# Altium PCB Vapour Phase Shield.PcbDoc
Units mm, origin at the board's own origin, x right, y up, seen from the top; angles counter-clockwise.
Board outline 80 x 100 mm, 2 copper layers (Top Layer, Bottom Layer), stack 1.621 mm thick; 38 components, 25 nets, 171 pads, 312 vias.
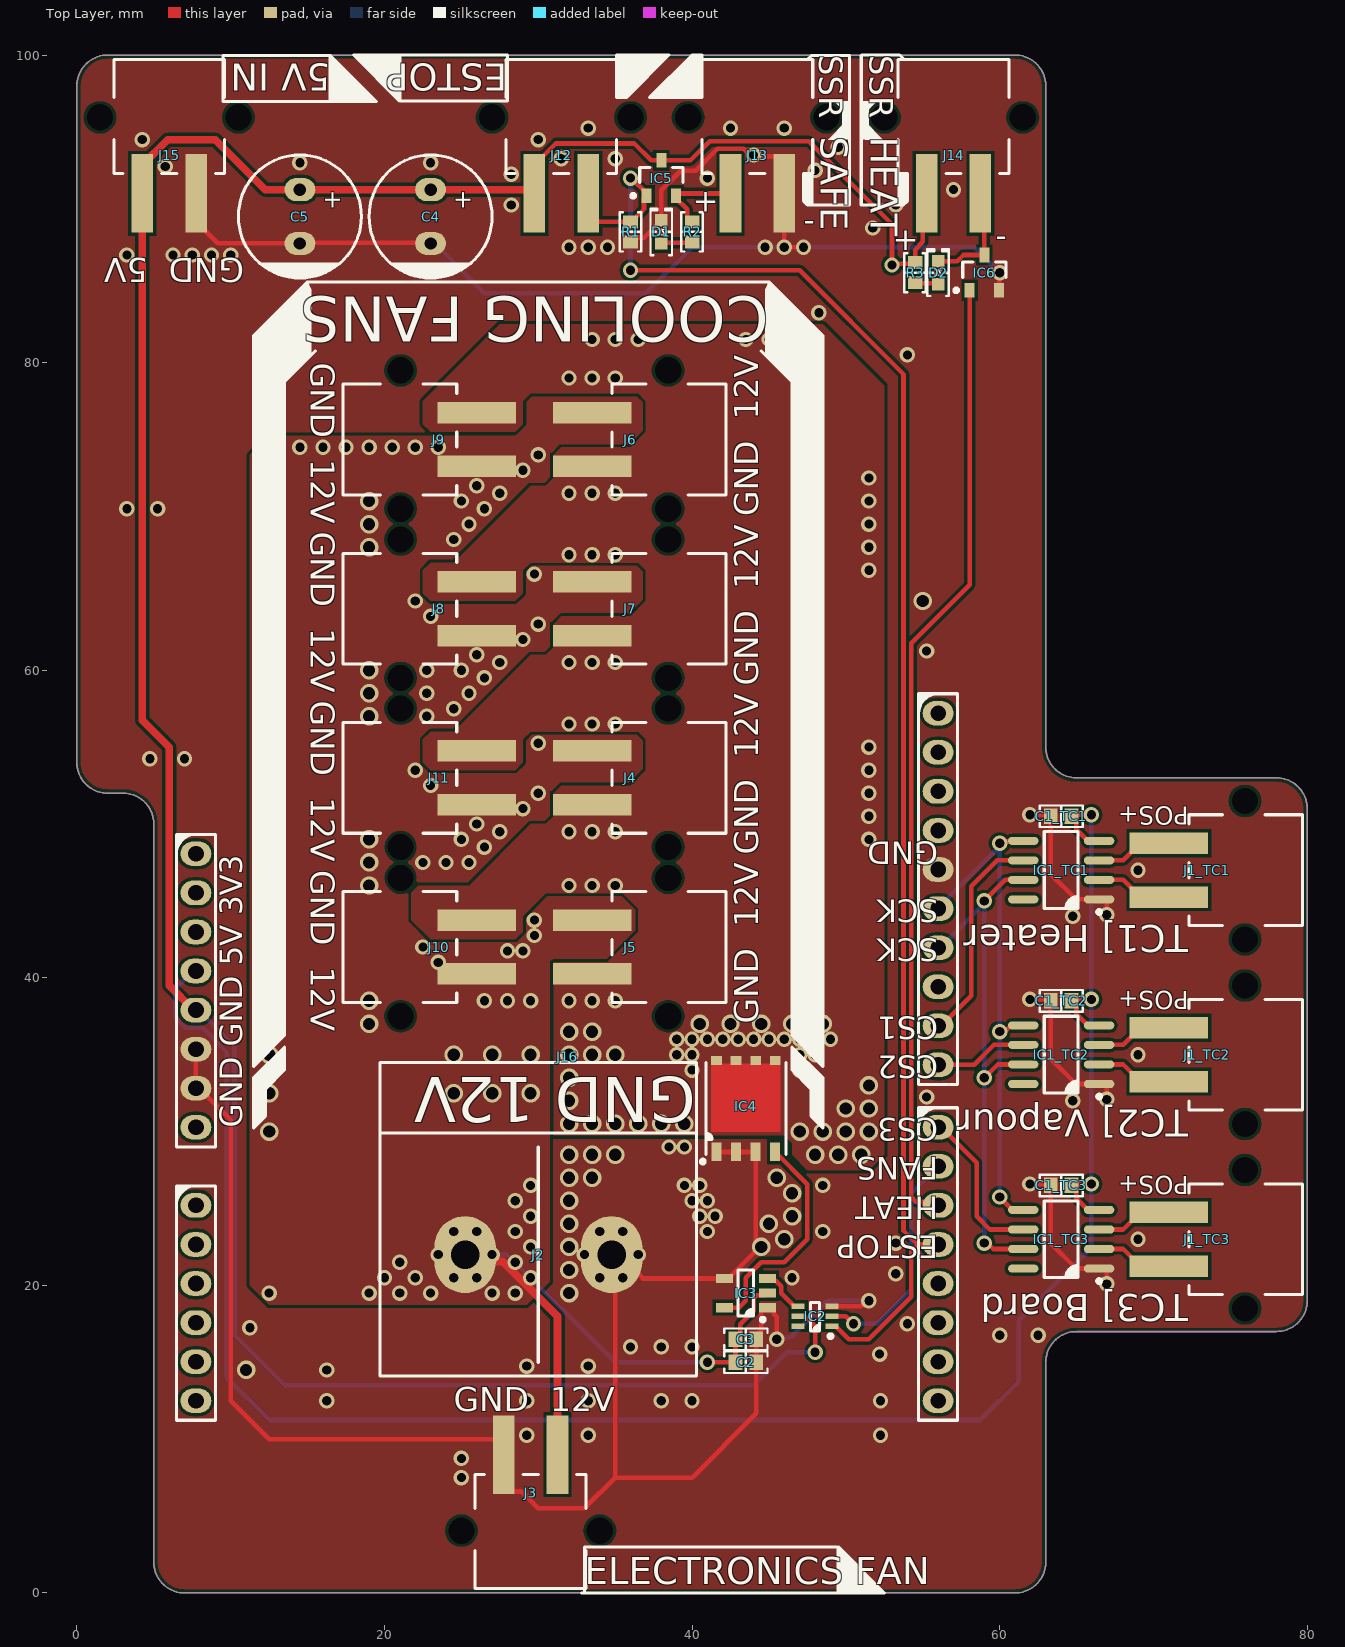
[diagram p0: Top Layer view]
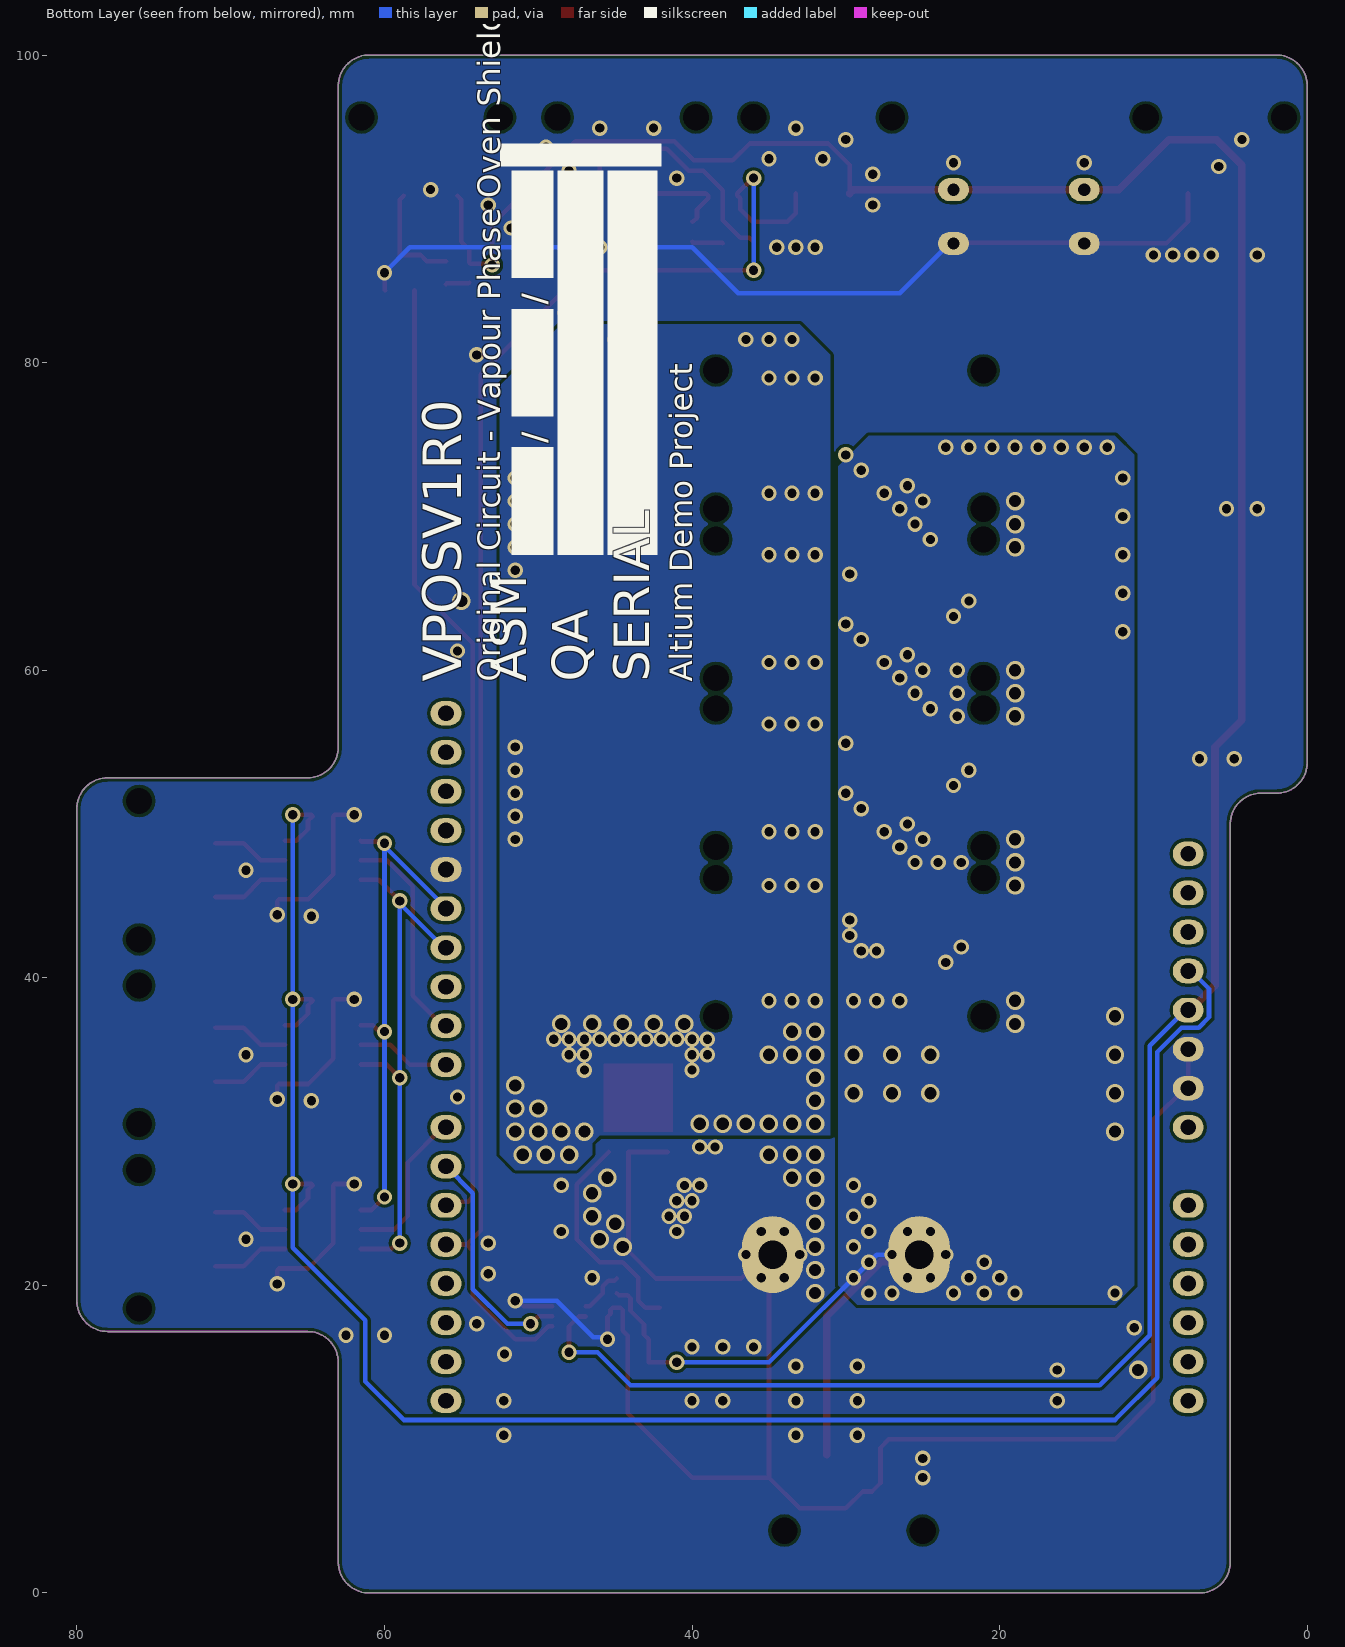
[diagram p1: Bottom Layer view, seen from below]

## Layer stack, top to bottom
Top Solder: solder mask 0.0102, Solder Resist, Dk 3.5
Top Layer: signal copper 0.0356
Dielectric1: core 1.55, FR-4, Dk 4.8
Bottom Layer: signal copper 0.0356
Bottom Solder: solder mask 0.0102, Solder Resist, Dk 3.5

## Board outline
5,2 5,50 ccw(c3,50) 3,52 2,52 cw(c2,54) 0,54 0,98 cw(c2,98) 2,100 61,100 cw(c61,98) 63,98 63,55 ccw(c65,55) 65,53 78,53 cw(c78,51) 80,51 80,19 cw(c78,19) 78,17 65,17 ccw(c65,15) 63,15 63,2 cw(c61,2) 61,0 7,0 cw(c7,2)

## Design rules (kind name [scope] priority, off if disabled: settings)
Clearance PadClearance [IsPad vs IsPad] p1: gap=0.2 ignorepadtopadclearanceinfootprint=FALSE except(0: Arc-Hole Track-Hole SMDPad-Hole THPad-Hole Via-Hole Fill-Hole Poly-Hole Region-Hole Text-Hole)
Clearance [All] p2: gap=0.2 ignorepadtopadclearanceinfootprint=FALSE except(0: Arc-Hole Track-Hole SMDPad-Hole THPad-Hole Via-Hole Fill-Hole Poly-Hole Region-Hole Text-Hole)
HoleSize [All] p1: absolutevalues=TRUE maxlimit=6 minlimit=0.4 maxpercent=80.000 minpercent=20.000
HoleToHoleClearance [All] p1: gap=0.2 allowstackedmicrovias=TRUE
MinimumSolderMaskSliver [All] p1: minsoldermaskwidth=0
PolygonConnect ViaConnect [IsVia] p1: connectstyle=Direct reliefconductorwidth=0.254 reliefentries=4 polygonreliefangle="90 Angle" airgapwidth=0.254
PolygonConnect [All] p2: connectstyle=Direct reliefconductorwidth=0.3 reliefentries=4 polygonreliefangle="90 Angle" airgapwidth=0.254
RoomDefinition VapourPhaseController [InComponentClass('VapourPhaseController')] p1: confinementstyle=ConfineIn formatcopy=TRUE lockcomponents=FALSE outline -0.5,7.88 63.5,7.88 63.5,101 -0.5,101
RoomDefinition TC3 [InComponentClass('TC3')] p2: confinementstyle=ConfineIn formatcopy=TRUE lockcomponents=FALSE outline 81,29.5 59.5,29.5 59.5,16.5 81,16.5
RoomDefinition TC2 [InComponentClass('TC2')] p3: confinementstyle=ConfineIn formatcopy=TRUE lockcomponents=FALSE outline 81,41.5 59.5,41.5 59.5,28.5 81,28.5
RoomDefinition TC1 [InComponentClass('TC1')] p4: confinementstyle=ConfineIn formatcopy=TRUE lockcomponents=FALSE outline 81,53.5 59.5,53.5 59.5,40.5 81,40.5
RoomDefinition HEATER [InComponentClass('HEATER')] p5: confinementstyle=ConfineIn formatcopy=TRUE lockcomponents=FALSE outline 51,100.5 51,83.85 63,83.85 63,100.5
RoomDefinition FANS [InComponentClass('FANS')] p6: confinementstyle=ConfineIn formatcopy=TRUE lockcomponents=FALSE outline 15.5,-1.5 50.5,-1.5 50.5,85 15.5,85
RoomDefinition ESTOP [InComponentClass('ESTOP')] p7: confinementstyle=ConfineIn formatcopy=TRUE lockcomponents=FALSE outline 25.5,100.5 25.5,86.5 50.5,86.5 50.5,100.5
RoutingVias [All] p1: holewidth=0.6 width=1 viastyle="Through Hole" minholewidth=0.4 minwidth=0.8 maxholewidth=5 maxwidth=6
SilkToSilkClearance [All] p1: silktosilkclearance=0
SilkToSolderMaskClearance SilkscreenOverComponentPads [IsPad] p1: minsilkscreentomaskgap=0.05 clearancetoexposedcopper=TRUE
SolderMaskExpansion "Via Tenting" [IsVia] p1: expansion=-2 istentingtop=FALSE
SolderMaskExpansion [All] p2: expansion=0.102 istentingtop=FALSE
Width [All] p1: maxlimit=2 minlimit=0.2 preferedwidth=0.4
25 further rules are at their usual default settings.

## Classes and differential pairs
channel class Thermocouple: TC1 TC2 TC3
net class SPI_CS[1..3]: SPI_CS1 SPI_CS2 SPI_CS3
component class VapourPhaseController: C4 C5 J15 J16
component class TC3: C1_TC3 IC1_TC3 J1_TC3
component class TC2: C1_TC2 IC1_TC2 J1_TC2
component class TC1: C1_TC1 IC1_TC1 J1_TC1
component class HEATER: D2 IC6 J14 R3
component class FANS: C2 C3 IC2 IC3 IC4 J2 J3 J4 J5 J6 J7 J8 J9 J10 J11
component class ESTOP: D1 IC5 J12 J13 R1 R2

## Components (designator, comment, footprint, x,y, rotation, side; value= is the part's Value field where it differs from the comment)
C1_TC1 "0.1µF" "CAP 0603_1608" 64,50.5 r0 top (schematic designator C1)
C1_TC2 "0.1µF" "CAP 0603_1608" 64,38.5 r0 top (schematic designator C1)
C1_TC3 "0.1µF" "CAP 0603_1608" 64,26.5 r0 top (schematic designator C1)
C2 "1µF" "CAP 0603_1608" 43.5,15 r180 top
C3 "0.1µF" "CAP 0603_1608" 43.5,16.5 r180 top
C4 "470µF" "CAP AL TH D8 L3.5 H12.5" 23,89.5 r270 top
C5 "470µF" "CAP AL TH D8 L3.5 H12.5" 14.5,89.5 r270 top
D1 "Green" "LED 0603_1608 GREEN" 38,88.5 r90 top
D2 "Green" "LED 0603_1608 GREEN" 56,85.85 r90 top
IC1_TC1 "MAX31855KASA+T" "MAXIM SOIC-8 S8" 64,47 r180 top (schematic designator IC1)
IC1_TC2 "MAX31855KASA+T" "MAXIM SOIC-8 S8" 64,35 r180 top (schematic designator IC1)
IC1_TC3 "MAX31855KASA+T" "MAXIM SOIC-8 S8" 64,23 r180 top (schematic designator IC1)
IC2 "SN74LVC1G32DCKR" "TI SC70-6 DCK" 48,18 r180 top
IC3 "MCP1402T-E/OT" "MICROCHIP SOT-23-5 OT" 43.5,19.5 r180 top
IC4 "BSC016N04LSGATMA1" "INFINEON PG-TDSON-8" 43.5,31.5 r90 top
IC5 "DMG2305UX-13" "DIODES SOT-23-3" 38,92 r90 top
IC6 "2N7002-7-F" "DIODES SOT-23-3" 59,85.85 r90 top
J1_TC1 "691508110302" "WURTH 691508110302" 76,47 r270 top (schematic designator J1)
J1_TC2 "691508110302" "WURTH 691508110302" 76,35 r270 top (schematic designator J1)
J1_TC3 "691508110302" "WURTH 691508110302" 76,23 r270 top (schematic designator J1)
J2 "NC6-P108-02" "TE NC6-P108-02" 30,22 r0 top
J3 "691508110302" "WURTH 691508110302" 29.5,4 r180 top
J4 "691508110302" "WURTH 691508110302" 38.5,53 r270 top
J5 "691508110302" "WURTH 691508110302" 38.5,42 r270 top
J6 "691508110302" "WURTH 691508110302" 38.5,75 r270 top
J7 "691508110302" "WURTH 691508110302" 38.5,64 r270 top
J8 "691508110302" "WURTH 691508110302" 21,64 r90 top
J9 "691508110302" "WURTH 691508110302" 21,75 r90 top
J10 "691508110302" "WURTH 691508110302" 21,42 r90 top
J11 "691508110302" "WURTH 691508110302" 21,53 r90 top
J12 "691508110302" "WURTH 691508110302" 31.5,96 r0 top
J13 "691508110302" "WURTH 691508110302" 44.25,96 r0 top
J14 "691508110302" "WURTH 691508110302" 57,96 r0 top
J15 "691508110302" "WURTH 691508110302" 6,96 r0 top
J16 "920-0088-01" "SCHMARTBOARD - 920-0088-01" 31.87,34.85 r0 top locked
R1 "10 kOhms" "RES 0603_1608" 36,88.5 r90 top
R2 "620 Ohms" "RES 0603_1608" 40,88.5 r90 top
R3 "620 Ohms" "RES 0603_1608" 54.5,85.85 r90 top

## Footprints (in the part's own frame and the unit in brackets; to place one, negate y for a bottom-side part, rotate by r counter-clockwise, add the part's x,y. Pads: shape width x height; smd on the part's side, far side on the other; paste and mask are expansions set on the pad)
"CAP 0603_1608" [mm] "Chip Capacitor, 2-Leads, Body 1.60x0.80mm, IPC Medium Density"
  rect 0.9x1 smd: 1(-0.675,0) 2(0.675,0)
  silkscreen extent -1.4,-0.7 1.4,0.7, body extent -0.8,-0.41 0.8,0.41, height 0.82
"CAP AL TH D8 L3.5 H12.5" [mm] "8MM Diameter, 3.5MM Lead Spacing Aluminium Capacitor"
  oval 1.5x2 hole 0.8: 1(-1.75,0) 2(1.75,0)
  silkscreen extent -4,-4 4,4, body extent -4,-4 4,4, height 11.5
"DIODES SOT-23-3" [mm] "SOT23, 3-Leads, Body 2.90x2.40mm, Pitch 0.95mm, IPC Medium Density"
  rect 0.95x0.65 smd: 1(-1.15,0.95) 2(-1.15,-0.95) 3(1.15,0)
  silkscreen extent -1.27,-1.4 0.7,1.95, body extent -1.41,-1.45 1.41,1.45, height 1.5
"INFINEON PG-TDSON-8" [mm] "TDSON, 8-Leads, Body 6x5mm, Pitch 1.27mm, Thermal Pad 1.65x2.38mm, IPC Medium Density"
  rect 1.2x0.65 smd: 1(-2.825,1.905) 2(-2.825,0.635) 3(-2.825,-0.635) 4(-2.825,-1.905)
  rect 0.6x0.7 smd: 5(3.125,-1.905) 6(3.125,-0.635) 7(3.125,0.635) 8(3.125,1.905)
  Top Layer region: -1.5,-2.25 2.9,-2.25 2.9,2.25 -1.5,2.25
  silkscreen extent -3.57,-2.6 3,2.92, body extent -3.07,-2.58 3.08,2.57, height 1
"LED 0603_1608 GREEN" [mm] "Chip Diode, 2-Leads, Body 1.60x0.80mm, IPC Medium Density"
  rect 0.8x0.8 smd: 1(-0.75,0) 2(0.75,0)
  silkscreen extent -1.52,-0.7 1.52,0.7, body extent -0.8,-0.4 0.8,0.4, height 0.53
"MAXIM SOIC-8 S8" [mm] "SOIC, 8-Leads, Body 4.90x3.90mm, Pitch 1.27mm, IPC Medium Density"
  oval 1.98x0.53 smd: 1(-2.465,1.905) 2(-2.465,0.635) 3(-2.465,-0.635) 4(-2.465,-1.905) 5(2.465,-1.905) 6(2.465,-0.635) 7(2.465,0.635) 8(2.465,1.905)
  silkscreen extent -2.59,-2.5 1.1,2.84, body extent -3.01,-2.45 3.01,2.45, height 1.5
"MICROCHIP SOT-23-5 OT" [mm] "SOT23, 5-Leads, Body 2.90x2.70mm, Pitch 0.95mm, IPC Medium Density"
  rect 1.1x0.6 smd: 1(-1.4,0.95) 2(-1.4,0) 3(-1.4,-0.95) 4(1.4,-0.95) 5(1.4,0.95)
  silkscreen extent -1.23,-1.5 0.5,1.85, body extent -1.36,-1.45 1.36,1.45, height 1.19
"RES 0603_1608" [mm] "Chip Resistor, 2-Leads, Body 1.60x0.80mm, IPC Medium Density"
  rect 0.85x0.95 smd: 1(-0.65,0) 2(0.65,0)
  silkscreen extent -1.27,-0.7 1.27,0.7, body extent -0.8,-0.4 0.8,0.4, height 0.45
"SCHMARTBOARD - 920-0088-01" [mm] "Arduino pin header set"
  oval 2x1.6 hole 1.02: 1(-24.13,13.21) 2(-24.13,10.67) 3(-24.13,8.13) 4(-24.13,5.59) 5(-24.13,3.05) 6(-24.13,0.51) 7(-24.13,-2.03) 8(-24.13,-4.57) 10(-24.13,-9.65) 11(-24.13,-12.19) 12(-24.13,-14.73) 13(-24.13,-17.27) 14(-24.13,-19.81) 15(-24.13,-22.35) 16(24.13,-22.35) 17(24.13,-19.81) 18(24.13,-17.27) 19(24.13,-14.73) 20(24.13,-12.19) 21(24.13,-9.65) 22(24.13,-7.11) 23(24.13,-4.57) 24(24.13,-0.51) 25(24.13,2.03) 26(24.13,4.57) 27(24.13,7.11) 28(24.13,9.65) 29(24.13,12.19) 30(24.13,14.73) 31(24.13,17.27) 32(24.13,19.81) 33(24.13,22.35)
  silkscreen extent -25.4,-23.62 25.4,23.62, body extent -25.4,-23.62 25.4,23.62, height 8.5
"TE NC6-P108-02" [mm]
  oval 4x5 hole 1.854: 1(-4.763,0) 2(4.763,0)
  silkscreen extent -10.3,-7.9 10.3,7.9, body extent -10.31,-7.94 10.29,7.94, height 16.38
"TI SC70-6 DCK" [mm] "SC70, 6-Leads, Body 2.00x2.10mm, Pitch 0.65mm, IPC Medium Density"
  rect 0.85x0.35 smd: 1(-1.1,0.65) 2(-1.1,0) 3(-1.1,-0.65) 4(1.1,-0.65) 5(1.1,0) 6(1.1,0.65)
  silkscreen extent -1.13,-0.9 0.3,1.42, body extent -1.06,-1 1.06,1, height 1.1
"WURTH 691508110302" [mm]
  rect 1.4x5.1 smd: 1(-1.75,-5) 2(1.75,-5)
  round 1 hole 1.7 unplated: M(-4.5,-0.05) M(4.5,-0.05)
  silkscreen extent -3.6,-3.7 3.6,3.7, body extent -5.18,-7.2 5.18,3.7, height 11.2

## Part data
C1_TC1 C1_TC2 C1_TC3 C3: library part 06035C104JAT4A, "CAP CER 0.1UF 50V X7R 0603", Device Package="0603 (1608 Metric)", Manufacturer="AVX Corporation", Operating Temperature="-55°C ~ 125°C", Supplier Part Number 1=478-12459-1-ND, Temperature Coefficient=X7R, Tolerance=±5%, Voltage - Rated=50V, Applications="General Purpose", Capacitance=0.1µF, ComponentLink1Description=Datasheet, ComponentLink1URL=http://datasheets.avx.com/X7RDielectric.pdf, ComponentLink2Description="DigiKey Link", ComponentLink2URL=http://digikey.com/product-detail/en/avx-corporation/06035C104JAT4A/478-12459-1-ND/9749311, LastUpdated="21/01/2020 00:02:08", Lifecycle Status=Active, Minimum Order=1, Mounting Type="Surface Mount, MLCC", Package / Case="0603 (1608 Metric)", Packaging=TapeAndReel, Part Number=06035C104JAT4A, Part Status=Active, PartId=3002, Price=0.01, Series=-, Size / Dimension="0.063\" L x 0.032\" W (1.60mm x 0.81mm)", Supplier 1=DigiKey, Thickness (Max)="0.035\" (0.90mm)"
C2: library part CC0603KRX5R8BB105, "CAP CER 1UF 25V X5R 0603", Device Package="0603 (1608 Metric)", Manufacturer=Yageo, Operating Temperature="-55°C ~ 85°C", Supplier Part Number 1=311-1445-1-ND, Temperature Coefficient=X5R, Tolerance=±10%, Voltage - Rated=25V, Applications="General Purpose", Capacitance=1µF, ComponentLink1Description=Datasheet, ComponentLink1URL=https://www.yageo.com/upload/media/product/productsearch/datasheet/mlcc/UPY-GPHC_X5R_4V-to-50V_25.pdf, ComponentLink2Description="DigiKey Link", ComponentLink2URL=http://digikey.com/product-detail/en/yageo/CC0603KRX5R8BB105/311-1445-1-ND/2833751, LastUpdated="21/01/2020 00:02:05", Lifecycle Status=Active, Minimum Order=1, Mounting Type="Surface Mount, MLCC", Package / Case="0603 (1608 Metric)", Packaging=TapeAndReel, Part Number=CC0603KRX5R8BB105, Part Status=Active, PartId=5146, Price=0.01, Series=CC, Size / Dimension="0.063\" L x 0.031\" W (1.60mm x 0.80mm)", Supplier 1=DigiKey, Thickness (Max)="0.035\" (0.90mm)"
C4 C5: library part ECA-1CM471, "CAP ALUM 470UF 20% 16V RADIAL", Device Package="Radial, Can", Lifetime @ Temp.="2000 Hrs @ 85°C", Manufacturer="Panasonic Electronic Components", Operating Temperature="-40°C ~ 85°C", Ripple Current @ High Frequency="748mA @ 10kHz", Ripple Current @ Low Frequency="440mA @ 120Hz", Supplier Part Number 1=P5141-ND, Tolerance=±20%, Voltage - Rated=16V, Applications="General Purpose", Capacitance=470µF, ComponentLink1Description=Datasheet, ComponentLink1URL=//media.digikey.com/pdf/Data%20Sheets/Panasonic%20Electronic%20Components/ECA-xxM%20Series,TypeA.pdf, ComponentLink2Description="DigiKey Link", ComponentLink2URL=http://digikey.com/product-detail/en/panasonic-electronic-components/ECA-1CM471/P5141-ND/245000, Height - Seated (Max)="0.492\" (12.50mm)", LastUpdated="21/01/2020 03:40:57", Lead Spacing="0.138\" (3.50mm)", Lifecycle Status=Active, Minimum Order=1, Mounting Type="Through Hole", Package / Case="Radial, Can", Packaging=Bulk, Part Number=ECA-1CM471, Part Status=Active, PartId=7263, Polarization=Polar, Price=0.10, Series=M, Size / Dimension="0.315\" Dia (8.00mm)", Supplier 1=DigiKey
D1 D2: library part LTST-C190KGKT, "LED GREEN CLEAR CHIP SMD", Current - Test=20mA, Device Package="0603 (1608 Metric)", Lens Color=Colorless, Manufacturer="Lite-On Inc.", Millicandela Rating=35mcd, Supplier Device Package="Chip LED", Supplier Part Number 1=160-1435-1-ND, Voltage - Forward (Vf) (Typ)=2V, Color=Green, ComponentLink1Description=Datasheet, ComponentLink1URL=http://optoelectronics.liteon.com/upload/download/DS22-2000-074/LTST-C190KGKT.PDF, ComponentLink2Description="DigiKey Link", ComponentLink2URL=http://digikey.com/product-detail/en/lite-on-inc/LTST-C190KGKT/160-1435-1-ND/386814, Configuration=Standard, Height (Max)=0.90mm, LastUpdated="21/01/2020 03:12:09", Lens Size="1.10mm x 0.80mm", Lens Style="Rectangle with Flat Top", Lens Transparency=Clear, Lifecycle Status=Active, Minimum Order=1, Mounting Type="Surface Mount", Package / Case="0603 (1608 Metric)", Packaging=TapeAndReel, Part Number=LTST-C190KGKT, Part Status=Active, PartId=657, Price=0.04, Series=-, Size / Dimension="1.60mm L x 0.80mm W", Supplier 1=DigiKey, Viewing Angle=130°, Wavelength - Dominant=571nm, Wavelength - Peak=574nm
IC1_TC1 IC1_TC2 IC1_TC3: "IC CONV THERMOCOUPLE-DGTL 8SOIC", Current - Supply=900µA, Device Package="8-SOIC (0.154\", 3.90mm Width)", Manufacturer="Maxim Integrated", Operating Temperature="-40°C ~ 125°C", Supplier Device Package=8-SOIC, Supplier Part Number 1=MAX31855KASA+TCT-ND, ComponentLink1Description=Datasheet, ComponentLink1URL=https://datasheets.maximintegrated.com/en/ds/MAX31855.pdf, ComponentLink2Description="DigiKey Link", ComponentLink2URL=http://digikey.com/product-detail/en/maxim-integrated/MAX31855KASA-T/MAX31855KASA-TCT-ND/2708805, Input Type="Thermocouple (Multiple)", LastUpdated="30/01/2020 23:28:47", Lifecycle Status=Active, Minimum Order=1, Mounting Type="Surface Mount", Output Type=Digital, Package / Case="8-SOIC (0.154\", 3.90mm Width)", Packaging=TapeAndReel, Part Number=MAX31855KASA+T, Part Status=Active, Price=3.35, Series=-, Supplier 1=DigiKey, Type="Thermocouple to Digital Converter"
IC2: "IC GATE OR 1CH 2-INP SC70-5", Current - Output High, Low="32mA, 32mA", Current - Quiescent (Max)=10µA, Device Package="5-TSSOP, SC-70-5, SOT-353", Manufacturer="Texas Instruments", Operating Temperature="-40°C ~ 125°C", Supplier Device Package=SC-70-5, Supplier Part Number 1=296-9848-1-ND, Voltage - Supply="1.65V ~ 5.5V", ComponentLink1Description=Datasheet, ComponentLink1URL=http://www.ti.com/general/docs/suppproductinfo.tsp?distId=10&gotoUrl=http%3A%2F%2Fwww.ti.com%2Flit%2Fgpn%2Fsn74lvc1g32, ComponentLink2Description="DigiKey Link", ComponentLink2URL=http://digikey.com/product-detail/en/texas-instruments/SN74LVC1G32DCKR/296-9848-1-ND/380106, LastUpdated="31/01/2020 03:20:00", Lifecycle Status=Active, Logic Level - High="1.7V ~ 2V", Logic Level - Low="0.7V ~ 0.8V", Logic Type="OR Gate", Max Propagation Delay @ V, Max CL="4ns @ 5V, 50pF", Minimum Order=1, Mounting Type="Surface Mount", Number of Circuits=1, Number of Inputs=2, Package / Case="5-TSSOP, SC-70-5, SOT-353", Packaging=TapeAndReel, Part Number=SN74LVC1G32DCKR, Part Status=Active, PartId=3, Price=0.05, Series=74LVC, Supplier 1=DigiKey
IC3: "IC GATE DRVR LOW-SIDE SOT23-5", Current - Peak Output (Source, Sink)="500mA, 500mA", Device Package="SC-74A, SOT-753", Logic Voltage - VIL, VIH="0.8V, 2.4V", Manufacturer="Microchip Technology", Operating Temperature="-40°C ~ 150°C (TJ)", Supplier Device Package=SOT-23-5, Supplier Part Number 1=MCP1402T-E/OTCT-ND, Voltage - Supply="4.5V ~ 18V", Channel Type=Single, ComponentLink1Description=Datasheet, ComponentLink1URL=http://www.microchip.com/mymicrochip/filehandler.aspx?ddocname=en530890, ComponentLink2Description="DigiKey Link", ComponentLink2URL=http://digikey.com/product-detail/en/microchip-technology/MCP1402T-E-OT/MCP1402T-E-OTCT-ND/1956554, Driven Configuration=Low-Side, Gate Type="IGBT, N-Channel, P-Channel MOSFET", Input Type=Non-Inverting, LastUpdated="31/01/2020 01:34:33", Lifecycle Status=Active, Minimum Order=1, Mounting Type="Surface Mount", Number of Drivers=1, Package / Case="SC-74A, SOT-753", Packaging=TapeAndReel, Part Number=MCP1402T-E/OT, Part Status=Active, PartId=10, Price=0.47, Rise / Fall Time (Typ)="19ns, 15ns", Series=-, Supplier 1=DigiKey
IC4: "MOSFET N-CH 40V 100A TDSON-8", Current - Continuous Drain (Id) @ 25°C="31A (Ta), 100A (Tc)", Device Package=8-PowerTDFN, Drain to Source Voltage (Vdss)=40V, Drive Voltage (Max Rds On,  Min Rds On)="4.5V, 10V", Input Capacitance (Ciss) (Max) @ Vds="12000pF @ 20V", Manufacturer="Infineon Technologies", Operating Temperature="-55°C ~ 150°C (TJ)", Power Dissipation (Max)="2.5W (Ta), 139W (Tc)", Supplier Device Package=PG-TDSON-8-1, Supplier Part Number 1=BSC016N04LSGATMA1CT-ND, ComponentLink1Description=Datasheet, ComponentLink1URL=https://www.infineon.com/dgdl/BSC016N04LSG_rev1.6.pdf?folderId=db3a304313b8b5a60113cee8763b02d7&fileId=db3a304318a6cd680118efe284830226, ComponentLink2Description="DigiKey Link", ComponentLink2URL=http://digikey.com/product-detail/en/infineon-technologies/BSC016N04LSGATMA1/BSC016N04LSGATMA1CT-ND/2231025, FET Type=N-Channel, Gate Charge (Qg) (Max) @ Vgs="150nC @ 10V", LastUpdated="21/01/2020 03:59:50", Lifecycle Status=Active, Minimum Order=1, Mounting Type="Surface Mount", Package / Case=8-PowerTDFN, Packaging=TapeAndReel, Part Number=BSC016N04LSGATMA1, Part Status=Active, Price=0.95, Rds On (Max) @ Id, Vgs="1.6mOhm @ 50A, 10V", Series=OptiMOS™, Supplier 1=DigiKey, Technology="MOSFET (Metal Oxide)", Vgs (Max)=±20V, Vgs(th) (Max) @ Id="2V @ 85µA"
IC5: "MOSFET P-CH 20V 4.2A SOT23", Current - Continuous Drain (Id) @ 25°C="4.2A (Ta)", Device Package="TO-236-3, SC-59, SOT-23-3", Drain to Source Voltage (Vdss)=20V, Drive Voltage (Max Rds On,  Min Rds On)="1.8V, 4.5V", Input Capacitance (Ciss) (Max) @ Vds="808pF @ 15V", Manufacturer="Diodes Incorporated", Operating Temperature="-55°C ~ 150°C (TJ)", Power Dissipation (Max)="1.4W (Ta)", Supplier Device Package=SOT-23, Supplier Part Number 1=DMG2305UX-13DICT-ND, ComponentLink1Description=Datasheet, ComponentLink1URL=https://www.diodes.com/assets/Datasheets/DMG2305UX.pdf, ComponentLink2Description="DigiKey Link", ComponentLink2URL=http://digikey.com/product-detail/en/diodes-incorporated/DMG2305UX-13/DMG2305UX-13DICT-ND/4251589, FET Type=P-Channel, Gate Charge (Qg) (Max) @ Vgs="10.2nC @ 4.5V", LastUpdated="21/01/2020 04:00:37", Lifecycle Status=Active, Minimum Order=1, Mounting Type="Surface Mount", Package / Case="TO-236-3, SC-59, SOT-23-3", Packaging=TapeAndReel, Part Number=DMG2305UX-13, Part Status=Active, Price=0.05, Rds On (Max) @ Id, Vgs="52mOhm @ 4.2A, 4.5V", Series=-, Supplier 1=DigiKey, Technology="MOSFET (Metal Oxide)", Vgs (Max)=±8V, Vgs(th) (Max) @ Id="900mV @ 250µA"
IC6: "MOSFET N-CH 60V 115MA SOT23-3", Current - Continuous Drain (Id) @ 25°C="115mA (Ta)", Device Package="TO-236-3, SC-59, SOT-23-3", Drain to Source Voltage (Vdss)=60V, Drive Voltage (Max Rds On,  Min Rds On)="5V, 10V", Input Capacitance (Ciss) (Max) @ Vds="50pF @ 25V", Manufacturer="Diodes Incorporated", Operating Temperature="-55°C ~ 150°C (TJ)", Power Dissipation (Max)="370mW (Ta)", Supplier Device Package=SOT-23-3, Supplier Part Number 1=2N7002-FDICT-ND, ComponentLink1Description=Datasheet, ComponentLink1URL=https://www.diodes.com/assets/Datasheets/ds11303.pdf, ComponentLink2Description="DigiKey Link", ComponentLink2URL=http://digikey.com/product-detail/en/diodes-incorporated/2N7002-7-F/2N7002-FDICT-ND/717800, FET Type=N-Channel, LastUpdated="21/01/2020 04:00:25", Lifecycle Status=Active, Minimum Order=1, Mounting Type="Surface Mount", Package / Case="TO-236-3, SC-59, SOT-23-3", Packaging=TapeAndReel, Part Number=2N7002-7-F, Part Status=Active, Price=0.03, Rds On (Max) @ Id, Vgs="7.5Ohm @ 50mA, 5V", Series=-, Supplier 1=DigiKey, Technology="MOSFET (Metal Oxide)", Vgs (Max)=±20V, Vgs(th) (Max) @ Id="2.5V @ 250µA"
J1_TC1 J1_TC2 J1_TC3 J3 J4 J5 J6 J7 J8 J9 J10 J11 J12 J13 J14 J15: "TERM BLOCK 2POS 3.5MM SMD", Color=Black, Current=10A, Manufacturer="Würth Elektronik", Supplier Part Number 1=732-5963-1-ND, Voltage=300V, ComponentLink1Description=Datasheet, ComponentLink1URL=https://katalog.we-online.de/em/datasheet/6915081103xx.pdf, ComponentLink2Description="DigiKey Link", ComponentLink2URL=http://digikey.com/product-detail/en/w-rth-elektronik/691508110302/732-5963-1-ND/5047612, Features="Board Guide, Mounting Flange", LastUpdated="15/01/2020 04:18:55", Lifecycle Status=Active, Mating Orientation="Horizontal and Vertical with Board", Minimum Order=1, Mounting Type="Surface Mount", Number of Levels=1, Packaging=TapeAndReel, Part Number=691508110302, Part Status=Active, Pitch="0.138\" (3.50mm)", Positions Per Level=2, Price=1.57, Series="WR-TBL Series 5081", Supplier 1=DigiKey, Wire Gauge="16-30 AWG", Wire Termination="Screw - Rising Cage Clamp"
J2: "CONN BARRIER STRIP 2CIRC 0.375\"", Color=Black, Current Rating (Amps)=20A, Manufacturer="TE Connectivity AMP Connectors", Supplier Part Number 1=A98495-ND, Voltage Rating=300V, Barrier Type="2 Wall (Dual)", Bottom Termination="PC Pin", ComponentLink1Description=Datasheet, ComponentLink1URL=https://www.te.com/commerce/DocumentDelivery/DDEController?Action=srchrtrv&DocNm=3-1437664-0&DocType=Customer+Drawing&DocLang=English, ComponentLink2Description="DigiKey Link", ComponentLink2URL=http://digikey.com/product-detail/en/te-connectivity-amp-connectors/NC6-P108-02/A98495-ND/1277926, LastUpdated="15/01/2020 04:11:24", Lifecycle Status=Active, Minimum Order=1, Number of Circuits=2, Number of Rows=1, Number of Wire Entries=2, Packaging=Bulk, Part Number=NC6-P108-02, Part Status=Active, Pitch="0.375\" (9.53mm)", Price=1.56, Series="NC6, Buchanan", Supplier 1=DigiKey, Terminal Block Type="Barrier Block", Top Termination="Screws with Captive Plate", Wire Gauge="12-22 AWG"
J16: "CONN HDR 8/10P 0.1 GOLD PCB 6PC", Insulation Color=Black, Manufacturer="Schmartboard, Inc.", Supplier Part Number 1=1988-1036-ND, ComponentLink1Description=Datasheet, ComponentLink1URL=http://schmartboard.com/content/Brochures/920-0088-01.pdf, ComponentLink2Description="DigiKey Link", ComponentLink2URL=http://digikey.com/product-detail/en/schmartboard-inc/920-0088-01/1988-1036-ND/9559319, Connector Type=Header, Contact Finish - Mating=Gold, Contact Finish - Post=Gold, Contact Length - Post="0.413\" (10.50mm)", Contact Type="Female Socket", Fastening Type=Push-Pull, Insulation Height="0.335\" (8.51mm)", LastUpdated="31/01/2020 20:49:58", Lifecycle Status=Active, Minimum Order=1, Mounting Type="Through Hole", Number of Positions="6, 8, 10", Number of Positions Loaded=All, Number of Rows=1, Packaging=Bulk, Part Number=920-0088-01, Part Status=Active, Pitch - Mating="0.100\" (2.54mm)", Price=5.00, Series=-, Style="Board to Board", Supplier 1=DigiKey, Termination=Solder
R1: library part ERJ-PA3J103V, "RES SMD 10K OHM 5% 1/4W 0603", Device Package="0603 (1608 Metric)", Manufacturer="Panasonic Electronic Components", Operating Temperature="-55°C ~ 155°C", Power (Watts)="0.25W, 1/4W", Ratings=AEC-Q200, Supplier Device Package=0603, Supplier Part Number 1=P10KBZCT-ND, Temperature Coefficient=±200ppm/°C, Tolerance=±5%, ComponentLink1Description=Datasheet, ComponentLink1URL=https://industrial.panasonic.com/cdbs/www-data/pdf/RDO0000/AOA0000C331.pdf, ComponentLink2Description="DigiKey Link", ComponentLink2URL=http://digikey.com/product-detail/en/panasonic-electronic-components/ERJ-PA3J103V/P10KBZCT-ND/5036237, Composition="Thick Film", Features="Automotive AEC-Q200, Pulse Withstanding", Height - Seated (Max)="0.022\" (0.55mm)", LastUpdated="21/01/2020 00:23:23", Lifecycle Status=Active, Minimum Order=1, Number of Terminations=2, Package / Case="0603 (1608 Metric)", Packaging=TapeAndReel, Part Number=ERJ-PA3J103V, Part Status=Active, PartId=8965, Price=0.01, Resistance="10 kOhms", Series=ERJ, Size / Dimension="0.063\" L x 0.031\" W (1.60mm x 0.80mm)", Supplier 1=DigiKey
R2 R3: library part ERJ-3GEYJ621V, "RES SMD 620 OHM 5% 1/10W 0603", Device Package="0603 (1608 Metric)", Manufacturer="Panasonic Electronic Components", Operating Temperature="-55°C ~ 155°C", Power (Watts)="0.1W, 1/10W", Ratings=AEC-Q200, Supplier Device Package=0603, Supplier Part Number 1=P620GCT-ND, Temperature Coefficient=±200ppm/°C, Tolerance=±5%, ComponentLink1Description=Datasheet, ComponentLink1URL=http://industrial.panasonic.com/www-cgi/jvcr13pz.cgi?E+PZ+3+AOA0001+ERJ3GEYJ621V+7+WW, ComponentLink2Description="DigiKey Link", ComponentLink2URL=http://digikey.com/product-detail/en/panasonic-electronic-components/ERJ-3GEYJ621V/P620GCT-ND/134820, Composition="Thick Film", Features="Automotive AEC-Q200", Height - Seated (Max)="0.022\" (0.55mm)", LastUpdated="21/01/2020 00:23:40", Lifecycle Status=Active, Minimum Order=1, Number of Terminations=2, Package / Case="0603 (1608 Metric)", Packaging=TapeAndReel, Part Number=ERJ-3GEYJ621V, Part Status=Active, PartId=8112, Price=0.01, Resistance="620 Ohms", Series=ERJ, Size / Dimension="0.063\" L x 0.031\" W (1.60mm x 0.80mm)", Supplier 1=DigiKey

## Via types
v1: diameter 1, hole 0.6, Top Layer to Bottom Layer, 245 vias
v2: diameter 1.2, hole 0.8, Top Layer to Bottom Layer, 67 vias

## Nets (pads, with @x,y where several pads share a name; then routed paths per layer and width w, separated by ;. In a path a pad name is that pad's centre, name@x,y a point inside that pad or via, vN(x,y) a via of type N, cw(c..) or ccw(c..) an arc to the next point about the centre after c; other vN are vias at no path point)
3V3: C1_TC1.2 C1_TC2.2 C1_TC3.2 IC1_TC1.4 IC1_TC2.4 IC1_TC3.4 J16.4 | length 133.9
  Top Layer w0.3: v1(65.965,26.595) 64.77,26.595 C1_TC3.2 64.975,26.2 64.975,25.67 65.74,24.905 IC1_TC3.4 ; v1(65.965,38.595) 64.77,38.595 C1_TC2.2 64.975,38.2 64.975,37.67 65.74,36.905 IC1_TC2.4 ; v1(65.965,50.595) 64.77,50.595 C1_TC1.2 64.975,50.2 64.975,49.67 65.74,48.905 IC1_TC1.4
  Bottom Layer w0.3: J16.4 7.54,40.44 6.39,39.29 6.39,37.424 7.064,36.75 8.176,36.75 9.75,35.176 9.75,14 12.5,11.25 58.75,11.25 61.25,13.75 61.25,17.72 65.965,22.435 v1(65.965,26.595) v1(65.965,38.595) v1(65.965,50.595)
5V: C4.1 C5.1 IC2.5 IC5.3 J12.1 J14.1 J15.1 J16.5 R3.2 | length 187.2
  Top Layer w0.3: J12.1 29.75,92.85 31.15,94.25 36.25,94.25 37.35,93.15 IC5.3 39.9,93.15 41.15,94.4 47.6,94.4 53,89 v1(53,86.35) 53.075,86.425 54.425,86.425 R3.2 54.5,87.35 55,87.85 55,90.6 J14.1@55.25,90.85 ; IC2.5 46.925,17.975 47.37,17.975 48,17.345 v1(48,15.65)
  Top Layer w0.5: J16.5 7.6,37.9 6,39.5 6,55 4.25,56.75 J15.1 4.25,92.85 5.9,94.5 9,94.5 12.25,91.25 C5.1 C4.1 29.5,91.25 J12.1
  Bottom Layer w0.3: J16.5 7.94,37.9 10.25,35.59 10.25,16.75 13.5,13.5 44,13.5 46.15,15.65 v1(48,15.65)
12V: C2.2 C3.2 IC3.2 J2.1 J3.1 J4.1 J5.1 J6.1 J7.1 J8.1 J9.1 J10.1 J11.1 | length 42.9
  Top Layer w0.3: v1(41,15) C2.2 C3.2 43.125,16.8 43.125,17.482 44,18.357 44,19.174 44.176,19.35 44.75,19.35 IC3.2
  Top Layer w0.5: J2.1 25.682,21.555 27.695,21.555 31.25,18 J3.1
  Bottom Layer w0.3: J2.1 28,22 35,15 v1(41,15)
  other v1: 12.5,19.5 19,19.5 21,19.5 23,19.5 27,19.5 28.5,19.5 20,20.5 22,20.5 24.5,20.5 26,20.5 29.5,20.5 21,21.5 28.5,21.5 23.5,22 27,22 29.5,22.5 24.5,23.5 26,23.5 28.5,23.5 29.5,24.5 28.5,25.5 29.5,26.5 26.5,38.5 28,38.5 29.5,38.5 23.5,41 28,41.75 29,41.75 22.5,42 29.75,42.75 29.75,43.75 22.5,47.5 24,47.5 25.5,47.5 26.5,48.5 25,49 27.5,49.5 26,50 29,51 30,52 23,52.5 22,53.5 30,55.25 22.75,57 24.5,57.5 22.75,58.5 25.5,58.5 26.5,59.5 22.75,60 25,60 27.5,60.5 26,61 29,62 12,62.5 30,63 23,63.5 22,64.5 12,65 29.75,66.25 12,67.5 24.5,68.5 25.5,69.5 12,70 26.5,70.5 25,71 27.5,71.5 26,72 12,72.5 29,73 30,74 13,74.5 14.5,74.5 16,74.5 17.5,74.5 19,74.5 20.5,74.5 22,74.5 23.5,74.5
  other v2: 12.5,30 12.5,32.5 24.5,32.5 27,32.5 29.5,32.5 12.5,35 24.5,35 27,35 29.5,35 19,37 12.5,37.5 19,38.5 19,46 19,47.5 19,49 19,57 19,58.5 19,60 19,68 19,69.5 19,71
ESTOP: IC2.1 IC5.1 J12.2 J16.20 R1.2 | length 103.1
  Top Layer w0.3: J12.2 33.25,89.7 33.8,89.15 R1.2 36.05,89.15 36.875,89.975 36.875,90.675 IC5.1 37.05,91 36.05,92 v1(36,92) ; v1(36,86) 47,86 53.75,79.25 53.75,23.57 54.66,22.66 ; IC2.1 49.35,17.35 50.2,16.5 51.5,16.5 54.25,19.25 54.25,22.25 54.66,22.66 ; J16.20 54.66,22.66
  Bottom Layer w0.3: v1(36,86) v1(36,92)
FANCTL: IC2.2 J16.22 | length 15
  Top Layer w0.3: IC2.2 50,18 v1(50.5,17.5)
  Bottom Layer w0.3: v1(50.5,17.5) 52,17.5 54.25,19.75 54.25,26 55.99,27.74 J16.22
FANGND: IC4.5 IC4.6 IC4.7 IC4.8 J4.2 J5.2 J6.2 J7.2 J8.2 J9.2 J10.2 J11.2
  other v1: 40,34 47,34 39,35 40,35 47,35 48,35 39,36 40,36 41,36 42,36 43,36 44,36 45,36 46,36 47,36 48,36 49,36 32,38.5 33.5,38.5 35,38.5 32,46 33.5,46 35,46 51.5,49 32,49.5 33.5,49.5 35,49.5 51.5,50.5 51.5,52 51.5,53.5 51.5,55 32,56.5 33.5,56.5 35,56.5 32,60.5 33.5,60.5 35,60.5 51.5,66.5 32,67.5 33.5,67.5 35,67.5 51.5,68 51.5,69.5 51.5,71 32,71.5 33.5,71.5 35,71.5 51.5,72.5 32,79 33.5,79 35,79 33.5,81.5 35,81.5 36.5,81.5 43.5,81.5 45,81.5 46.5,81.5 48,81.5
  other v2: 48,28.5 49.5,28.5 51,28.5 47,30 48.5,30 50,30 51.5,30 32,30.5 33.5,30.5 35,30.5 36.5,30.5 38,30.5 39.5,30.5 50,31.5 51.5,31.5 32,32 51.5,33 32,33.5 32,35 33.5,35 35,35 32,36.5 33.5,36.5 40.5,37 42.5,37 44.5,37 46.5,37 48.5,37
GND: C1_TC1.1 C1_TC2.1 C1_TC3.1 C2.1 C3.1 C4.2 C5.2 D1.2 IC1_TC1.1 IC1_TC2.1 IC1_TC3.1 IC2.3 IC3.1 IC3.4 IC4.1 IC4.2 IC4.3 IC6.2 J2.2 J3.2 J13.2 J15.2 J16.6 J16.7 J16.29 R1.1 | length 228.4
  Top Layer w0.3: J16.6 J16.7 7.94,32.82 10,30.76 10,12.5 12.5,10 27.2,10 27.75,9.45 J3.2 27.75,7.15 28.3,6.6 28.9,6.6 30,5.5 33,5.5 35,7.5 ; J15.2 7.75,89.15 9.15,87.75 C5.2 14.55,87.8 C4.2@23,87.8 ; R1.1 36.275,88.125 36.875,88.125 D1.2 38,91.195 39.278,92.472 40.228,92.472 41.655,93.9 43.345,93.9 43.845,93.4 45.45,93.4 46,92.85 J13.2 v1(46,87.5) v1@47,87.5 ; IC4.1 IC4.2 IC4.3 44.135,22.235 42.35,20.45 IC3.4 36.814,20.45 35.264,22 J2.2 35,21.762 35,7.5 ; v1(45.5,16.5) 45.5,17.95 45.3,18.15 45.3,18.4 45.15,18.55 IC3.1 44.65,18.55 44.5,18.4 44.5,17.037 44.175,16.712 C3.1 C2.1 44.175,11.675 40,7.5 35,7.5 ; IC2.3 50.961,18.65 51.311,19 v1(51.5,19) ; IC6.2 59.975,84.725 59.975,85.825 v1(60,85.85) ; v1(61.965,26.595) 63.23,26.595 C1_TC3.1 63.325,22.735 64.965,21.095 IC1_TC3.1 66.859,21.095 66.965,20.989 v1(66.965,20.095) ; v1(61.965,38.595) 63.23,38.595 C1_TC2.1 63.325,34.735 64.965,33.095 IC1_TC2.1 66.859,33.095 66.965,32.989 v1(66.965,32.095) ; v1(61.965,50.595) 63.23,50.595 C1_TC1.1 63.325,46.735 64.965,45.095 IC1_TC1.1 66.859,45.095 66.965,44.989 v1(66.965,44.095)
  Bottom Layer w0.3: C4.2 23.25,87.75 26.5,84.5 37,84.5 40,87.5 v1(46,87.5) ; v1(45.5,16.5) 45.634,16.634 46.427,16.634 48.793,19 v1(51.5,19) ; v1@47,87.5 58.35,87.5 v1(60,85.85)
  other v1: 25,7.5 25,8.75 29.25,10.25 33.25,10.25 52.25,10.25 16.25,12.5 29.25,12.5 33.25,12.5 38,12.5 40,12.5 52.25,12.5 16.25,14.5 29.25,14.75 33.25,14.75 52.193,15.534 36,16 38,16 40,16 60,16.75 62.5,16.75 11.25,17.25 54,17.5 34,20.5 35.5,20.5 46.5,20.5 53.25,20.75 33,22 36.5,22 53.25,22.75 69,23 34,23.5 35.5,23.5 41,23.5 48.5,23.5 40.5,24.5 41.5,24.5 40,25.5 41,25.5 39.5,26.5 40.5,26.5 48.5,26.5 38.5,29 39.5,29 64.75,32 55.25,32.25 69,35 64.75,44 69,47 4.75,54.25 7,54.25 55.25,61.25 3.25,70.5 5.25,70.5 54,80.5 48.25,83.25 3.25,87 6.25,87 7.5,87 8.75,87 10,87 32,87.5 33.25,87.5 34.5,87.5 44.75,87.5 47.25,87.5 51.75,88.75 28.25,90.25 53.25,90.25 57,91.25 41,92 28.25,92.25 48,92.5 5.75,92.75 14.5,93 23,93 31.5,93.25 35,93.25 44,93.5 49.5,94 4.25,94.5 30,94.5 33.25,95.25 42.5,95.25 46,95.25
  other v2: 11,14.5 32,19.5 32,21 32,22.5 44.5,22.5 46,23 32,24 45,24 46.5,24.5 32,25.5 46.5,26 32,27 33.5,27 45.5,27 32,28.5 33.5,28.5 35,28.5 55,64.5
HEATCTL: IC6.1 J16.21 | length 62.5
  Top Layer w0.3: J16.21 55.751,25.449 54.551,25.449 54.25,25.75 54.25,61.75 58.05,65.55 IC6.1
HEATER: D2.2 IC6.3 J14.2 | length 7.1
  Top Layer w0.3: D2.2 57.25,86.6 57.65,87 IC6.3 59,90.6 J14.2@58.75,90.85
NetD1_1: D1.1 R2.1 | length 2
  Top Layer w0.3: D1.1 38.05,87.8 39.95,87.8 R2.1
NetD2_1: D2.1 R3.1 | length 1.5
  Top Layer w0.3: R3.1 54.55,85.15 55.95,85.15 D2.1
NetIC2_4: IC2.4 IC3.3 | length 3
  Top Layer w0.3: IC3.3 45.05,20.3 45.445,20.3 45.8,19.945 45.8,19.5 46.65,18.65 IC2.4
NetIC3_5: IC3.5 IC4.4 | length 14.7
  Top Layer w0.3: IC3.5 43.05,18.55 43.5,19 43.5,20.5 44.5,21.5 46,21.5 47.5,23 47.5,26.58 IC4.4
SAFETYSSR: IC5.2 J13.1 R2.2 | length 5.8
  Top Layer w0.3: R2.2 39.95,89.15 39.675,89.425 39.675,89.975 38.95,90.7 IC5.2 39.1,91 J13.1
SPI_CS1: IC1_TC1.6 J16.25 | length 14.2
  Top Layer w0.3: J16.25 56.2,36.88 58.15,38.83 58.15,45.943 59.842,47.635 IC1_TC1.6
SPI_CS2: IC1_TC2.6 J16.24 | length 6.1
  Top Layer w0.3: J16.24 58.34,34.34 59.635,35.635 IC1_TC2.6
SPI_CS3: IC1_TC3.6 J16.23 | length 10.3
  Top Layer w0.3: J16.23 56.2,30.28 58.5,27.98 58.5,24.5 59.365,23.635 IC1_TC3.6
SPI_MISO: IC1_TC1.7 IC1_TC2.7 IC1_TC3.7 J16.27 | length 35.1
  Top Layer w0.3: v1(59,22.75) 59.189,22.75 59.574,22.365 IC1_TC3.7 ; v1(59,33.5) 59.865,34.365 IC1_TC2.7 ; v1(59,45) 60.365,46.365 IC1_TC1.7
  Bottom Layer w0.3: J16.27 56.13,41.96 v1@59,44.83 ; v1(59,22.75) v1(59,33.5) v1@59,44.83 ; v1(59,45) v1@59,44.83
SPI_SCK: IC1_TC1.5 IC1_TC2.5 IC1_TC3.5 J16.28 | length 33.4
  Top Layer w0.3: v1(60,25.75) 60,25.733 60.827,24.905 IC1_TC3.5 ; v1(60,48.75) 60.111,48.861 61.491,48.861 IC1_TC1.5 ; v1@60.477,36.634 60.748,36.905 IC1_TC2.5
  Bottom Layer w0.3: J16.28 56,44.561 v1@60,48.561 ; v1(60,25.75) v1(60,36.5) v1@60,48.561 ; v1(60,48.75) v1@60,48.561
TC_NEG_TC1: IC1_TC1.2 J1_TC1.2 | length 5
  Top Layer w0.3: IC1_TC1.2 68.035,46.365 69.15,45.25 J1_TC1.2
TC_NEG_TC2: IC1_TC2.2 J1_TC2.2 | length 5
  Top Layer w0.3: IC1_TC2.2 68.035,34.365 69.15,33.25 J1_TC2.2
TC_NEG_TC3: IC1_TC3.2 J1_TC3.2 | length 5
  Top Layer w0.3: IC1_TC3.2 68.035,22.365 69.15,21.25 J1_TC3.2
TC_POS_TC1: IC1_TC1.3 J1_TC1.1 | length 5
  Top Layer w0.3: IC1_TC1.3 68.035,47.635 69.15,48.75 J1_TC1.1
TC_POS_TC2: IC1_TC2.3 J1_TC2.1 | length 5
  Top Layer w0.3: IC1_TC2.3 68.035,35.635 69.15,36.75 J1_TC2.1
TC_POS_TC3: IC1_TC3.3 J1_TC3.1 | length 5
  Top Layer w0.3: IC1_TC3.3 68.035,23.635 69.15,24.75 J1_TC3.1
pads on no net: IC1_TC1.8 IC1_TC2.8 IC1_TC3.8 IC2.6 J1_TC1.M J1_TC2.M J1_TC3.M J3.M J4.M J5.M J6.M J7.M J8.M J9.M J10.M J11.M J12.M J13.M J14.M J15.M J16.1 J16.2 J16.3 J16.8 J16.10 J16.11 J16.12 J16.13 J16.14 J16.15 J16.16 J16.17 J16.18 J16.19 J16.26 J16.30 J16.31 J16.32 J16.33

## Polygon pours and split planes (outlines as drawn)
GND on Top Layer "Top Layer-GND" (solid, remove dead copper, pour order 36): 5,2 5,50 ccw(c3,50) 3,52 2,52 cw(c2,54) 0,54 0,98 cw(c2,98) 2,100 61,100 cw(c61,98) 63,98 63,55 ccw(c65,55) 65,53 78,53 cw(c78,51) 80,51 80,19 cw(c78,19) 78,17 65,17 ccw(c65,15) 63,15 63,2 cw(c61,2) 61,0 7,0 cw(c7,2)
12V on Top Layer "12V_L01_P035" (solid, remove dead copper, pour order 35): 37.25,78.25 37.25,41.25 31,41.25 30.75,41 30.75,20.25 29.25,18.75 12.5,18.75 11.25,20 11.25,74 12.5,75.25 28.5,75.25 29.25,76 29.25,78.05 29.5,78.25 31,78.25
FANGND on Top Layer "FANGND_L01_P034" (solid, remove dead copper, pour order 34): 47.5,27.5 46.5,28.5 46.5,29.25 46,29.75 41.25,29.75 31,29.75 31,32 31,41 34.5,41 36.5,43 36.5,44.5 35.5,45.5 30.5,45.5 29,44 29,43 28.5,42.5 23,42.5 21.75,43.75 21.75,45.538 22.212,46 25.5,46 29.5,50 30.5,50 31,50.5 31,52 31.5,52.5 36,52.5 37,53.5 37,55.5 36.5,56 29.5,56 29,55.5 29,54 28.5,53.5 23,53.5 22.5,54 22.5,55.5 23,56 24.5,56 29.5,61 30.5,61 31,61.5 31,63 31.5,63.5 36,63.5 37,64.5 37,66.5 36.5,67 29.5,67 29,66.5 29,65 28.5,64.5 23,64.5 22.5,65 22.5,66.5 23,67 24.5,67 29.5,72 30.5,72 31,72.5 31,74 31.5,74.5 36,74.5 37,75.5 37,77.5 36.5,78 29.5,78 29,77.5 29,76 28.5,75.5 23,75.5 22.5,76 22.5,77.5 23,78 27.5,82.5 48.5,82.5 52.5,78.5 52.5,28.5 51.5,27.5
GND on Bottom Layer "Top Layer-GND" (solid, remove dead copper, pour order 39): 5,2 5,50 ccw(c3,50) 3,52 2,52 cw(c2,54) 0,54 0,98 cw(c2,98) 2,100 61,100 cw(c61,98) 63,98 63,55 ccw(c65,55) 65,53 78,53 cw(c78,51) 80,51 80,19 cw(c78,19) 78,17 65,17 ccw(c65,15) 63,15 63,2 cw(c61,2) 61,0 7,0 cw(c7,2)
FANGND on Bottom Layer "FANGND_L02_P038" (solid, remove dead copper, pour order 38): 31,80.5 33,82.5 48.5,82.5 52.5,78.5 52.5,28.5 51.5,27.5 47.5,27.5 46.5,28.5 46.5,29.25 46,29.75 31,29.75
12V on Bottom Layer "12V_L02_P037" (solid, remove dead copper, pour order 37): 30.5,20 29.25,18.75 12.5,18.75 11.25,20 11.25,74 12.5,75.25 28.5,75.25 30.5,73.25

## Keep-outs
Keep-Out Layer:
  lines w0.1: 78,17 ccw(c78,19) 80,19 80,51 ccw(c78,51) 78,53 65,53 cw(c65,55) 63,55 63,98 ccw(c61,98) 61,100 2,100 ccw(c2,98) 0,98 0,54 ccw(c2,54) 2,52 3,52 cw(c3,50) 5,50 5,2 ccw(c7,2) 7,0 61,0 ccw(c61,2) 63,2 63,15 cw(c65,15) 65,17 78,17 ; 78,17 78,17

## Silkscreen, mask and mechanical layers (free items; w line width, h text height)
Top Overlay:
  drawing of 83 lines, arcs and shapes, not listed
  text "5V IN" at 16.477,100.032 h3 r180
  text "ESTOP" at 27.977,100.032 h3 r180
  text "SSR" at 47.75,100 h2.6 r270
  text "SSR" at 51.026,100 h2.6 r270
  text "SAFE" at 47.776,94.703 h3 r270
  text "HEAT" at 51.026,94.703 h3 r270
  text "+" at 41.75,91.564 h2.5 r180
  text "-" at 47.25,90.164 h2.5 r180
  text "-" at 59.75,89.164 h2.5 r180
  text "+" at 54.75,89.064 h2.5 r180
  text "GND  5V" at 10.875,87.317 h2.7 r180
  text "COOLING FANS" at 45,85.25 h5 r180
  text "GND  12V" at 14.683,80 h2.7 r270
  text "GND  12V" at 44.817,70 h2.7 r90
  text "GND  12V" at 14.683,69 h2.7 r270
  text "GND  12V" at 44.817,59 h2.7 r90
  text "GND  12V" at 14.683,58 h2.7 r270
  text "POS+" at 72.301,51.501 h2 r180
  text "GND" at 56,49.34 h2.5 r180
  text "GND  12V" at 44.817,48 h2.7 r90
  text "GND  12V" at 14.683,47 h2.7 r270
  text "SCK" at 56,45.565 h2.5 r180
  text "TC1] Heater" at 72.25,44 h3 r180
  text "SCK" at 56,43.025 h2.5 r180
  text "POS+" at 72.301,39.501 h2 r180
  text "CS1" at 56,37.945 h2.5 r180
  text "GND  12V" at 44.817,37 h2.7 r90
  text "CS2" at 56,35.405 h2.5 r180
  text "12V" at 29.75,34.5 h5 r180
  text "GND" at 40.25,34.5 h5 r180
  text "TC2] Vapour" at 72.25,32 h3 r180
  text "CS3" at 56,31.345 h2.5 r180
  text "GND GND 5V 3V3" at 11.25,30.25 h2.5 r90
  text "FANS" at 56,28.805 h2.5 r180
  text "POS+" at 72.301,27.501 h2 r180
  text "HEAT" at 56,26.265 h2.5 r180
  text "ESTOP" at 56,23.725 h2.5 r180
  text "TC3] Board" at 72.25,20 h3 r180
  text "GND  12V" at 24.5,11.283 h2.7
  text "ELECTRONICS FAN" at 33.023,-0.032 h3
Bottom Overlay:
  region: 49,74.5 49,67.5 51.75,67.5 51.75,74.5
  region: 45.75,92.5 45.75,67.5 48.75,67.5 48.75,92.5
  region: 42,94.25 42,92.75 52.5,92.75 52.5,94.25
  region: 42.25,92.5 42.25,67.5 45.5,67.5 45.5,92.5
  region: 49,83.5 49,76.5 51.75,76.5 51.75,83.5
  region: 49,92.5 49,85.5 51.75,85.5 51.75,92.5
  text "/" at 49,83.75 h3 r270
  text "/" at 49,74.75 h3 r270
  text "Altium Demo Project" at 39.5,59.25 h2.5 r270
  text "ASM / QA / SERIAL" at 42,59.25 h4 r270
  text "Original Circuit - Vapour Phase Oven Shield" at 52,59.25 h2.5 r270
  text "VPOSV1R0" at 55,59.25 h2.5 r270
Bottom Solder:
  text "Licensed under MIT License" at 0.75,52 h3 r270

## Text inside footprints (layer, text, board x,y; h text height)
C4: Top Overlay "+" at 24.25,91.25 h2 r270
C5: Top Overlay "+" at 15.75,91.25 h2 r270